# Altium PCB Power_Embedded_Board.PcbDoc (part 2 of 2)
Units mil, origin at the board's own origin, x right, y up, seen from the top; angles counter-clockwise.
Board outline 7315 x 2525 mil, 4 copper layers (Top Layer, Ground, Battery Voltage, Bottom Layer), stack 62.2 mil thick; 158 components, 109 nets, 580 pads, 136 vias.
Unrouted connection lines stored in the file: 1.
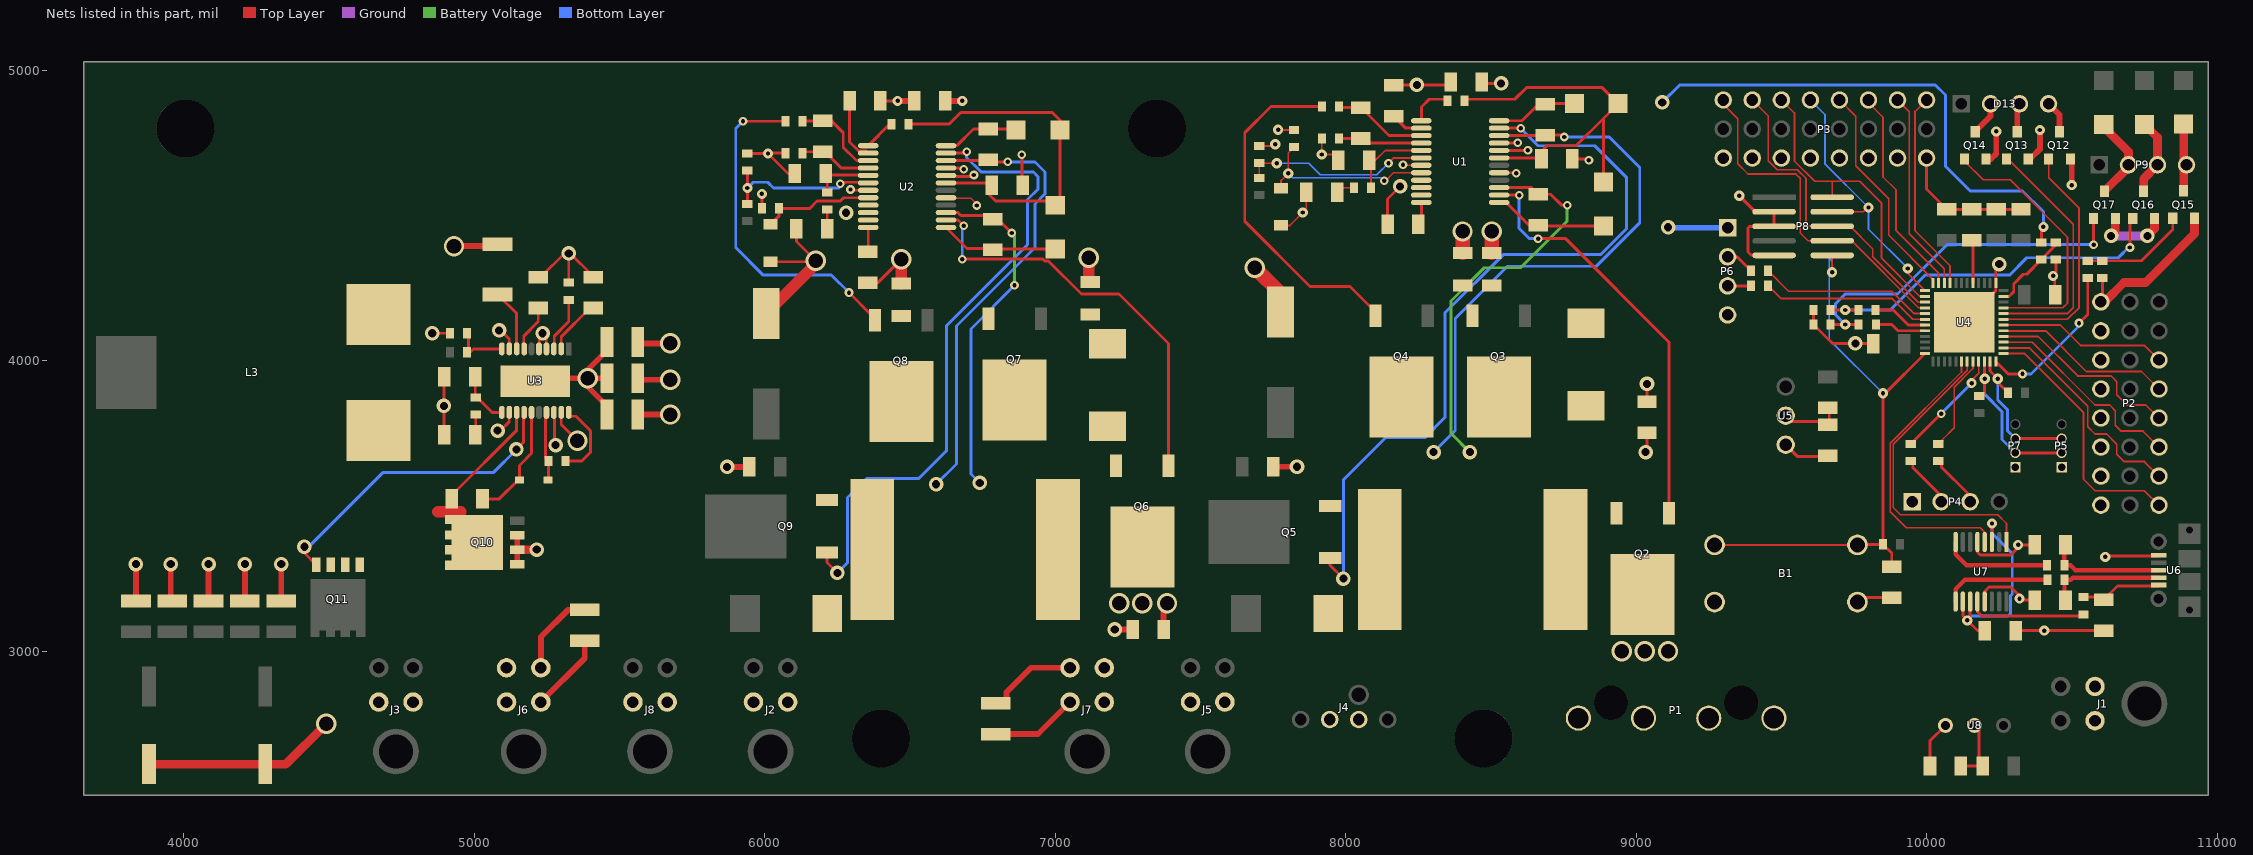
[diagram p4: the nets of this part, all layers, seen from the top]

## Via types
v1: diameter 50, hole 28, Top Layer to Bottom Layer, tented both sides, 45 vias
v2: diameter 35, hole 15, Top Layer to Bottom Layer, tented both sides, 37 vias
v3: diameter 30, hole 15, Top Layer to Bottom Layer, tented both sides, 35 vias
v4: diameter 70, hole 50, Top Layer to Bottom Layer, tented both sides, 19 vias

## Nets (pads, with @x,y where several pads share a name; then routed paths per layer and width w, separated by ;. In a path a pad name is that pad's centre, name@x,y a point inside that pad or via, vN(x,y) a via of type N, cw(c..) or ccw(c..) an arc to the next point about the centre after c; other vN are vias at no path point) (continued)
GND: B1.1 B1.2 C1.1 C2.1 C3.1 C4.1 C5.1 C6.1 C7.1 C8.1 C9.1 C13.1 C14.2 C15.1 C16.1 C17.1 C18.1 C19.1 C20.1 C21.1 C25.1 C26.2 C27.1 C28.1 C29.2 C30.1 C31.1 C32.1 C34.1 C35.1 C36.1 C37.2 C38.1 C39.2 C40.1 C41.1 C42.2 C43.1 C44.1 C45.1 C46.1 C47.1 C48.1 C49.1 C50.1 C51.1 C52.1 C53.1 C54.1 C55.2 C56.2 D4.2 D9.2 J1.1 J1.2 J2.1 J2.2 J3.1 J3.2 J4.2 J4.3 J5.1 J5.2 J6.3 J6.4 J7.3 J7.4 J8.1 J8.2 P1.1 P1.2 P2.3 P2.6 P2.9 P2.12 P2.15 P2.18 P2.21 P2.24 P3.3 P3.6 P3.9 P3.12 P3.15 P3.18 P3.21 P3.24 P4.1 P5.1 P6.4 P7.1 P8.3 P8.5 P8.9 Q10.1 Q10.2 Q10.3 Q12.S Q13.S Q14.S Q15.S Q16.S Q17.S R5.2 R6.1 R7.1 R10.1 R14.2 R15.1 R16.1 R20.1 R22.2 R24.1 R32.1 R39.1 R41.1 R43.1 U1.7 U1.9 U1.10 U1.11 U1.17 U1.20 U2.7 U2.9 U2.10 U2.11 U2.17 U2.20 U3.4 U3.5 U3.12 U3.18 U3.21 U4.0 U4.37 U5.2 U6.5 U7.5 U7.13 U8.2 | length 11075.9
  Top Layer w6: C36.1@3955,3178.15 C36.1@3960,3173.15 ; U2.17@6625.47,4560 6710,4560 6730,4540 v3(6730,4535) ; R10.1@7702.39,4739.59 7751.44,4739.59 v2(7757.39,4745.53) ; D4.2@7777.39,4466.16 7808.02,4466.16 v2(7852.39,4510.53) 7864.24,4522.39 C5.1@7864.24,4580.53 ; R5.2@7917.86,4765.53 7917.39,4765.06 v2(7917.39,4710.53) 7954.24,4710.53 C6.1@7974.24,4690.53 ; v3(8197.39,4675.53) 8199.75,4673.17 U1.7@8260.54,4673.17 ; v3@8585.34,4647.58 v3(8587.39,4645.53) ; v3@8626.21,4724.35 v3(8627.39,4725.53) ; v3@8832.39,4695.53 v3(8837.39,4690.53) ; U5.2@9515,3811.3 U5.2@9535,3791.3 ; B1.1@9762.13,3169.45 B1.1@9777.68,3185 ; v1@10238.27,4321.42 v1(10250,4333.15) ; v2@10315,3356.3 v2(10315,3366.3) ; v2@10320,3176.3 v2(10320,3181.3) ; v2@10441.3,4286.85 v2(10435.65,4292.5) v2@10445,4301.85
  Top Layer w10: v1(4855,4095) R24.1@4915.94,4095 ; C34.1@4896.85,3745 4895,3746.85 v1(4895,3845) 4895,3943.15 C32.1@4896.85,3945 ; v1(5080,3760) 5090,3760 5120.28,3790.28 U3.12@5120.28,3822.72 ; Q10.1@5147.8,3300.2 Q10.1@5147.99,3300 ; U3.21@5210,3930 U3.21@5220,3940 ; C29.2@5220,4293.15 5233.15,4293.15 5310,4370 v1(5325,4370) ; U3.5@5222.64,4041.22 5223.39,4041.97 5223.39,4072.56 5235,4084.18 v1(5235,4095) ; 5247.48,4071.7 5247.48,4041.97 U3.4@5248.23,4041.22 ; U3.18@5273.82,3822.72 5275.67,3820.86 5275.67,3714.33 v1(5280,3710) ; R22.2@5335,4265 5331.06,4265 5325,4271.06 v1(5325,4370) ; v4@5390,3911.38 v4(5390,3940) ; C31.1@5410,4288.15 5410,4290 5325,4375 v1(5325,4370) ; C30.1@5456.85,3815 C30.1@5456.85,3844.53 ; C27.1@5456.85,4035.47 C27.1@5456.85,4065 ; v1(5870,3635) v1@5885,3635 ; R20.1@5940,4714.06 v2(6010.94,4714.06) ; D9.2@6020,4341.26 6171.26,4341.26 v4(6175,4345) ; R14.2@6070.94,4715 6011.89,4715 v2(6010.94,4714.06) ; C18.1@6103.7,4645 6080,4645 v2(6010.94,4714.06) ; C17.1@6108.7,4455 6108.7,4411.3 v4(6175,4345) ; v4@6175,4333.23 v4(6175,4345) ; v3(6295,4590) 6297.8,4587.2 U2.7@6356.14,4587.2 ; C21.1@6355,4268.7 6388.7,4268.7 v4(6470,4350) ; C20.1@6398.15,4895 v2(6457.5,4895) ; C15.1@6505,4895 6510,4890 C15.1@6515,4895 ; U2.17@6623.86,4561.61 U2.17@6625.47,4560 ; U2.20@6623.86,4638.39 6627.24,4635 6715,4635 v3(6720,4640) ; C19.1@6878.15,4605 6885,4611.85 v3(6885,4710) ; C14.2@7775.54,4168.76 C14.2@7775.54,4232.39 ; C9.1@8144.24,4470.53 8144.24,4557.39 v1(8187.39,4600.53) ; C8.1@8165.54,4948.68 8176.85,4960 8186.85,4950 v1(8245,4950) 8351.85,4950 C4.1@8361.85,4960 ; U1.17@8528.25,4647.58 v3@8585.34,4647.58 ; U1.20@8528.25,4724.35 v3@8626.21,4724.35 ; C7.1@8780.54,4695.53 v3@8832.39,4695.53 ; C3.1@9037.39,3858.68 v1(9037.39,3920.53) ; v2(9355,4568.15) 9410,4513.15 P8.3@9475,4513.15 P8.5@9475,4463.15 9390.86,4463.15 9385,4457.29 9385,4375 9395.75,4364.25 9473.9,4364.25 P8.9@9475,4363.15 ; U5.2@9535,3791.3 9665,3791.3 9665,3821.3 C49.1@9680,3836.3 ; R41.1@9610.94,4175 R43.1@9610.94,4125 9675.94,4060 v1(9755,4060) 9815,4060 C47.1@9816.85,4058.15 ; B1.1@9777.68,3185 C54.1@9880,3185 ; P3.3@10000,4698.15 10000,4591.3 C46.1@10070,4521.3 C42.2@10155,4521.3 C45.1@10240,4521.3 C43.1@10325,4521.3 ; C1.1@10118.15,2605 C2.1@10193.7,2605 10180,2618.7 10180,2730 U8.2@10165,2745 ; U4.0@10130,4133.15 10238.27,4241.42 U4.37@10238.27,4268.39 v1@10238.27,4321.42 ; U7.5@10175,3376.3 10175,3341.3 10185,3331.3 10290,3331.3 v2@10315,3356.3 ; U7.13@10200,3171.3 10200,3206.3 10215,3221.3 10290,3221.3 10320,3191.3 v2(10320,3181.3) ; C53.1@10306.3,3071.3 v2(10405,3071.3) C50.1@10610,3071.3 ; v2(10315,3366.3) C51.1@10371.85,3366.3 ; v2@10320,3176.3 C52.1@10371.85,3176.3 ; C44.1@10441.3,4228.15 v2@10441.3,4286.85 ; v2@10445,4301.85 R32.1@10445,4348.62 ; P2.24@10600,4203.15 10605,4208.15 R39.1@10605,4285.47 ; v2(10615,3325) 10617.48,3327.48 U6.5@10798.7,3327.48
  Top Layer w20: C35.1@3835,3173.15 v1(3835,3300) ; C36.1@3955,3178.15 v1(3955,3300) ; C38.1@4085,3173.15 v1(4085,3300) ; C40.1@4210,3173.15 v1(4210,3300) ; C41.1@4335,3173.15 v1(4335,3300) ; Q10.1@5147.8,3300.2 Q10.2@5147.8,3350 Q10.3@5147.8,3400 ; U3.21@5220,3940 v4(5390,3940) ; J6.3@5229.06,2943.19 5229.06,3049.06 5323.15,3143.15 C55.2@5380,3143.15 ; v4@5390,3911.38 C30.1@5456.85,3844.53 ; C28.1@5456.85,3940 v4(5390,3940) ; C27.1@5456.85,4035.47 5390,3968.62 v4(5390,3940) ; v1@5885,3635 C25.1@5946.85,3635 ; v2(6457.5,4895) C15.1@6505,4895 ; C56.2@6795,2821.3 6820.98,2821.3 6832.63,2832.95 6832.63,2858.93 6916.89,2943.19 J7.4@7050.94,2943.19 ; v1(7205,3075) C16.1@7266.85,3075 ; C13.1@7750.54,3635.53 v1(7832.39,3635.53) ; Q14.S@10204.8,4695 10221.85,4695 10240,4713.15 v2(10240,4790) ; Q13.S@10359.8,4698.15 10390,4728.35 v2(10390,4795) ; Q12.S@10495,4698.15 Q12.S@10495,4695 10500,4690 v2(10500,4605)
  Top Layer w30: C37.2@3880,2611.14 C39.2@4280,2611.14 4351.14,2611.14 v4(4490,2750) ; Q10.2@5147.8,3350 v1(5215,3350) ; P2.24@10600,4203.15 10613.15,4203.15 10680,4270 10755,4270 10922.4,4437.4 Q15.S@10922.4,4490.51 ; v1(10635,4430) 10650,4445 Q17.S@10650,4490 ; v1(10760,4430) 10784.8,4454.8 Q16.S@10784.8,4490
  Top Layer w40: C26.2@6005,4163.23 v4@6175,4333.23 ; R15.1@6470,4266.1 v4(6470,4350) ; R16.1@7115,4271.1 v4(7115,4355)
  Top Layer w50: v4(7687.39,4320.53) C14.2@7775.54,4232.39 ; R6.1@8402.39,4371.64 v4(8402.39,4445.53) ; R7.1@8502.39,4371.64 v4(8502.39,4445.53)
  Ground w30: v1(10635,4430) v1(10760,4430)
  other v1: 6280,4510
NetC5_2: C5.2 R2.1 | length 63.5
  Top Layer w6: C5.2@7970.54,4580.53 7985.54,4595.53 R2.1@8027.86,4595.53
NetC6_2: C6.2 R2.2 U1.5 | length 291.7
  Top Layer w6: R2.2@8086.91,4595.53 8086.91,4684.16 C6.2@8080.54,4690.53 8102.39,4690.53 8136.21,4724.35 U1.5@8260.54,4724.35
NetC7_2: C7.2 D2.A D3.A R4.1 U1.19 | length 1291
  Top Layer w6: C7.2@8671.01,4698.76 C7.2@8674.24,4695.53 C7.2@8674.24,4722.39
  Top Layer w10: R4.1@8411.44,4900.53 8582.39,4900.53 8622.39,4940.53 8883.17,4940.53 D2.A@8938.17,4885.53 8887.39,4834.75 ; U1.19@8528.25,4698.76 C7.2@8671.01,4698.76 ; C7.2@8674.24,4722.39 8692.39,4740.53 8793.17,4740.53 8887.39,4834.75 ; D3.A@8887.39,4615.53 8887.39,4834.75
NetC8_2: C8.2 U1.2 | length 112.1
  Top Layer w10: C8.2@8165.54,4842.39 8206.8,4801.13 U1.2@8260.54,4801.13
NetC9_2: C9.2 U1.12 | length 96.4
  Top Layer w6: C9.2@8244.24,4455.53 C9.2@8260.54,4471.83
  Top Layer w10: C9.2@8260.54,4471.83 U1.12@8260.54,4545.22
NetC10_1: C10.1 D6.A L1.2 Q4.D Q5.S U1.22 | length 1983.2
  Top Layer w10: U1.22@8528.25,4775.53 C10.1@8687.39,4775.53 ; C10.1@8687.39,4777.39 8745.54,4777.39 v3(8752.39,4770.53)
  Bottom Layer w10: v1(8302.39,3685.53) 8377.39,3760.53 8377.39,4145.53 8557.39,4325.53 8862.39,4325.53 9012.39,4475.53 9012.39,4665.53 8907.39,4770.53 v3(8752.39,4770.53)
NetC10_2: C10.2 D2.K U1.24 | length 257.7
  Top Layer w6: C10.2@8687.39,4883.68 C10.2@8689.24,4885.53
  Top Layer w10: U1.24@8528.25,4826.72 8607.27,4826.72 C10.2@8662.39,4881.83 ; C10.2@8689.24,4885.53 D2.K@8787.39,4885.53
NetC11_1: C11.1 R5.1 U1.4 | length 290.1
  Top Layer w6: C11.1@8052.39,4765.53 C11.1@8067.98,4749.94
  Top Layer w10: R5.1@7976.91,4765.53 C11.1@8052.39,4765.53 ; C11.1@8067.98,4749.94 U1.4@8260.54,4749.94
NetC11_2: C11.2 R8.1 U1.3 | length 325
  Top Layer w6: R8.1@7976.91,4875.53 R8.1@7980.61,4871.83
  Top Layer w10: R8.1@7980.61,4871.83 C11.2@8052.39,4871.83 8148.69,4775.53 U1.3@8260.54,4775.53
NetC12_1: C12.1 D5.K L1.1 Q2.S Q3.D U1.15 | length 1375.2
  Top Layer w10: U1.15@8528.25,4596.4 8639.67,4596.4 C12.1@8662.39,4573.68 8705.54,4573.68 8743.69,4535.53 v3(8762.39,4535.53)
  Battery Voltage w10: v1(8427.39,3685.53) 8362.39,3750.53 8362.39,4205.53 8477.39,4320.53 8602.39,4320.53 8762.39,4480.53 v3(8762.39,4535.53)
NetC12_2: C12.2 D3.K U1.13 | length 392.5
  Top Layer w6: U1.13@8528.25,4545.22 U1.13@8552.7,4545.22 ; C12.2@8630.54,4467.39 C12.2@8662.39,4467.39 C12.2@8665.02,4464.75
  Top Layer w10: U1.13@8552.7,4545.22 C12.2@8630.54,4467.39 ; C12.2@8665.02,4464.75 D3.K@8887.39,4464.75
NetC17_2: C17.2 R11.1 | length 65.5
  Top Layer w10: C17.2@6215,4455 R11.1@6215,4520.47
NetC18_2: C18.2 R11.2 U2.5 | length 209.4
  Top Layer w10: C18.2@6210,4645 C18.2@6215,4640 ; R11.2@6215,4579.53 C18.2@6215,4640 ; U2.5@6356.14,4638.39 6354.53,4640 C18.2@6215,4640
NetC19_2: C19.2 D7.A D8.A R13.1 U2.19 | length 1272.9
  Top Layer w10: R13.1@6494.53,4815 6635,4815 6675,4855 6990,4855 7015.79,4829.21 D7.A@7015.79,4795 7015.79,4551.57 D8.A@7000,4535.79 6985.79,4550 6795,4550 6771.85,4573.15 C19.2@6771.85,4605 ; U2.19@6623.86,4612.8 6769.65,4612.8 C19.2@6771.85,4615
NetC20_2: C20.2 U2.2 | length 221.4
  Top Layer w10: C20.2@6291.85,4895 6291.85,4753.92 6322.38,4723.39 6347.91,4723.39 U2.2@6356.14,4715.16
NetC21_2: C21.2 U2.12 | length 84.7
  Top Layer w10: C21.2@6355,4375 6356.14,4376.14 U2.12@6356.14,4459.25
NetC22_1: C22.1 D11.A L2.2 Q8.D Q9.S U2.22 | length 1589.8
  Top Layer w10: U2.22@6623.86,4689.57 6767.72,4689.57 C22.1@6770,4691.85 6776.85,4685 v3(6836.85,4685)
  Bottom Layer w10: v1(6590,3575) 6660,3645 6660,4120 6930,4390 6930,4540 6965,4575 6965,4650 6930,4685 v3(6836.85,4685)
NetC22_2: C22.2 D7.K U2.24 | length 266.2
  Top Layer w10: U2.24@6623.86,4740.75 6660.75,4740.75 6718.15,4798.15 C22.2@6770,4798.15 6861.85,4798.15 D7.K@6865,4795
NetC23_1: C23.1 R14.1 U2.4 | length 251.4
  Top Layer w10: R14.1@6130,4715 6135,4720 C23.1@6200,4720 6207.12,4720 6263.14,4663.98 U2.4@6356.14,4663.98
NetC23_2: C23.2 R17.1 U2.3 | length 312.6
  Top Layer w10: R17.1@6130,4825 6131.3,4826.3 C23.2@6200,4826.3 6228.7,4826.3 6270,4785 6270,4735 6315.43,4689.57 U2.3@6356.14,4689.57
NetC24_1: C24.1 D10.K L2.1 Q6.S Q7.D U2.15 | length 1191.9
  Top Layer w10: U2.15@6623.86,4510.43 6664.57,4510.43 6675,4500 6778.15,4500 C24.1@6785,4493.15 ; C24.1@6785,4488.15 6801.85,4488.15 v3(6850,4440)
  Battery Voltage w10: v3(6850,4440) 6860,4430 v3(6860,4260)
  Bottom Layer w10: v1(6740,3580) 6710,3610 6710,4110 v3(6860,4260)
NetC24_2: C24.2 D8.K U2.13 | length 406.9
  Top Layer w10: U2.13@6623.86,4459.25 6696.26,4386.85 6785,4386.85 6786.85,4385 D8.K@7000,4385
NetC29_1: C29.1 U3.7 | length 166.9
  Top Layer w10: U3.7@5171.46,4041.22 5170,4042.68 5170,4085 5220,4135 C29.1@5220,4181.85 C29.1@5220,4186.85
NetC31_2: C31.2 U3.2 | length 193.4
  Top Layer w10: U3.2@5299.41,4041.22 5299.41,4083.07 5398.19,4181.85 C31.2@5410,4181.85
NetC32_2: C32.2 R26.2 U3.11 | length 182.4
  Top Layer w10: C32.2@5003.15,3945 5003.15,3876.38 R26.2@5005,3874.53 5008.94,3874.53 5060.75,3822.72 U3.11@5094.68,3822.72
NetC33_1: C33.1 L3.1 Q10.5 Q10.6 Q10.7 Q10.8 Q10.9 Q11.1 Q11.2 Q11.3 U3.13 | length 469
  Top Layer w10: C33.1@4921.85,3525 4921.85,3536.81 5145.87,3760.83 U3.13@5145.87,3822.72
  Top Layer w40: 4875,3480 4921.85,3480 4953.5,3480
NetC33_2: C33.2 D12.K U3.15 | length 403.9
  Top Layer w10: C33.2@5028.15,3525 5086.06,3525 5151.06,3590 D12.K@5155,3590 5155,3640 5197.05,3682.05 U3.15@5197.05,3822.72
NetC34_2: C34.2 R26.1 | length 71.2
  Top Layer w10: C34.2@5003.15,3745 5005,3746.85 R26.1@5005,3815.47
NetC42_1: C42.1 U4.41 | length 148.5
  Top Layer w6: C42.1@10155,4415 C42.1@10159.53,4410.47
  Top Layer w10: U4.41@10159.53,4268.39 C42.1@10159.53,4410.47
NetC50_2: C50.2 R37.1 U6.1 | length 282
  Top Layer w6: C50.2@10601.3,3186.3 C50.2@10610,3177.6
  Top Layer w10: R37.1@10540,3186.3 C50.2@10601.3,3186.3 ; C50.2@10610,3177.6 10657.52,3225.12 U6.1@10798.7,3225.12
NetC53_2: C53.2 U7.3 U7.10 U7.11 | length 778.7
  Top Layer w10: U7.10@10125,3171.3 10125,3121.3 v2(10140,3106.3) ; U7.11@10150,3171.3 10150,3116.3 v2(10140,3106.3) ; C53.2@10200,3071.3 10175,3071.3 v2(10140,3106.3) ; U7.3@10225,3376.3 v2(10225,3440)
  Bottom Layer w10: v2(10140,3106.3) 10155,3121.3 10280,3121.3 10289.5,3130.8 10289.5,3191.86 10295,3197.36 10295,3336.3 10225,3406.3 v2(10225,3440)
NetD4_1: D4.1 R3.1 U1.8 | length 639
  Top Layer w6: D4.1@7777.39,4594.9 7777.39,4620.53 v2(7802.39,4645.53) 7802.39,4715.53 R3.1@7822.39,4735.53 ; v3(8132.39,4620.53) 8137.39,4620.53 8164.43,4647.58 U1.8@8260.54,4647.58
  Bottom Layer w6: v2(7802.39,4645.53) 7817.39,4630.53 8122.39,4630.53 v3(8132.39,4620.53)
NetD5_A: D5.A Q3.S Q4.S R6.2 R7.2 R8.2 | length 1199.9
  Top Layer w10: R8.2@7917.86,4875.53 7742.39,4875.53 7652.39,4785.53 7652.39,4480.53 7877.39,4255.53 8014.47,4255.53 8102.23,4167.77 Q4.S@8102.23,4155.06
NetD9_1: D9.1 R12.1 U2.8 | length 389
  Top Layer w10: D9.1@6020,4470 6049.53,4499.53 R12.1@6049.53,4525 6155,4525 6180,4550 6260,4550 6271.61,4561.61 U2.8@6356.14,4561.61
NetD10_A: D10.A Q7.S Q8.S R15.2 R16.2 R17.2 | length 1151.6
  Top Layer w10: v3(5925,4825) R17.2@6070.94,4825 ; v3(6290,4235) Q8.S@6365,4160
  Bottom Layer w10: v3(5925,4825) 5900,4800 5900,4390 5995,4295 6230,4295 v3(6290,4235)
NetD12_A: D12.A R25.2 U3.17 | length 234.2
  Top Layer w10: U3.17@5248.23,3822.72 5245,3819.49 5245,3665.47 R25.2@5255.47,3655 5255.47,3597.05 D12.A@5253.43,3595
NetD13_2: D13.2 Q14.D | length 117.3
  Top Layer w20: Q14.D@10167.4,4789.49 10220,4842.09 D13.2@10220,4885
NetD13_3: D13.3 Q13.D | length 90.5
  Top Layer w20: Q13.D@10312.4,4792.64 D13.3@10312.4,4883.15
NetD13_4: D13.4 Q12.D | length 111.5
  Top Layer w20: D13.4@10420,4885 10457.6,4847.4 Q12.D@10457.6,4789.49 ; Q12.D@10459.83,4790.41 Q12.D@10460,4790
NetP4_2: P4.2 R28.2 | length 184
  Top Layer w10: R28.2@9945,3655.47 9952.45,3648.02 9952.45,3632.55 10040.43,3544.57 10040.43,3524.57 P4.2@10050,3515
NetP4_3: P4.3 R27.2 | length 187.4
  Top Layer w10: R27.2@10040,3655.47 10042.34,3655.47 10051.12,3646.69 10051.12,3633.88 10140.43,3544.57 10140.43,3524.57 P4.3@10150,3515
NetP6_2: P6.2 R29.1 | length 100.4
  Top Layer w10: P6.2@9315,4358.15 9347.32,4358.15 R29.1@9395.47,4310
NetP6_3: P6.3 R30.1 | length 80.5
  Top Layer w10: P6.3@9315,4258.15 R30.1@9395.47,4258.15
NetQ15_G: Q15.G R38.2 R39.2 | length 375.3
  Top Layer w10: R38.2@10555,4344.53 R39.2@10605,4344.53 10739.53,4344.53 10847.6,4452.6 Q15.G@10847.6,4490.51
NetQ16_G: Q16.G R40.2 R41.2 | length 1275.7
  Top Layer w10: R41.2@9670,4175 v2(9720,4175) R40.2@9765.47,4175 ; v3(10700,4390) 10700,4480 Q16.G@10710,4490
  Bottom Layer w10: v2(9720,4175) 9875,4175 9995,4295 10285,4295 10345,4355 10660,4355 10700,4395 v3(10700,4390)
NetQ17_G: Q17.G R42.2 R43.2 | length 1244.2
  Top Layer w10: R43.2@9670,4125 v2(9720,4125) R42.2@9765.94,4125 ; v3(10575,4400) 10575,4489.8 Q17.G@10575.2,4490
  Bottom Layer w10: v2(9720,4125) 9686.5,4158.5 9686.5,4196.5 9720,4230 9900,4230 10070,4400 v3(10575,4400)
NetR4_2: R4.2 U1.1 | length 149.9
  Top Layer w10: U1.1@8260.54,4826.72 8260.54,4873.68 8287.39,4900.53 R4.2@8352.39,4900.53
NetR9_1: R9.1 R10.2 U1.6 | length 649.3
  Top Layer w6: R9.1@7702.39,4630.06 R10.2@7702.39,4680.53 v2(7762.39,4680.53) ; v3(8147.39,4680.53) 8165.61,4698.76 U1.6@8260.54,4698.76
  Bottom Layer w6: v2(7762.39,4680.53) 7872.39,4680.53 7912.39,4640.53 8107.39,4640.53 v3(8147.39,4680.53)
NetR13_2: R13.2 U2.1 | length 110.1
  Top Layer w10: U2.1@6356.14,4740.75 6430.39,4815 R13.2@6435.47,4815
NetR19_1: R19.1 R20.2 U2.6 | length 562.8
  Top Layer w10: R19.1@5940,4540 v2(5940,4595) R20.2@5940,4655 ; v3(6260,4610) 6270,4610 6275,4615 6353.94,4615 U2.6@6356.14,4612.8
  Bottom Layer w10: v2(5940,4595) 5960,4615 6010,4615 6030,4595 6255,4595 6260,4600 v3(6260,4610)
NetR22_1: R22.1 U3.3 | length 195.4
  Top Layer w10: U3.3@5273.82,4041.22 5275,4042.4 5275,4085 5325,4135 5325,4205 5325.94,4205.94 R22.1@5335,4205.94
NetR23_2: R23.2 R24.2 U3.10 | length 190.2
  Top Layer w10: R23.2@4979.53,4030 R24.2@4979.53,4105 ; R23.2@4984.53,4028.94 4996.81,4041.22 U3.10@5094.68,4041.22
NetR25_1: R25.1 U3.20 | length 278.6
  Top Layer w10: R25.1@5314.53,3655 5370,3655 5400,3685 5400,3759.14 5349.84,3809.3 5329.47,3809.3 5325,3813.77 U3.20@5325,3822.72
NetR31_1: R31.1 R32.2 U4.35 | length 277.8
  Top Layer w6: R32.2@10445,4398.62 R32.2@10445,4407.68
  Top Layer w10: U4.35@10265.24,4221.73 10283.58,4221.73 10300,4238.15 10300,4265 10333.15,4298.15 10344.53,4298.15 R31.1@10395,4348.62 R32.2@10445,4398.62
NetR37_2: R37.2 U7.12 | length 408.7
  Top Layer w6: R37.2@10534.06,3121.3 R37.2@10540,3127.24
  Top Layer w10: U7.12@10175,3171.3 10175,3136.3 10190,3121.3 R37.2@10534.06,3121.3
NetR38_1: R38.1 U4.24 | length 550.8
  Top Layer w10: U4.24@10238.27,3997.91 10281.18,3955 v3(10330,3955) ; v3(10525,4130) 10555,4160 R38.1@10555,4285.47
  Bottom Layer w10: v3(10330,3955) 10360,3955 10525,4120 v3(10525,4130)
NetR40_1: R40.1 U4.7 | length 191.6
  Top Layer w10: R40.1@9824.53,4175 9885,4175 9936.69,4123.31 U4.7@9994.76,4123.31
NetR42_1: R42.1 U4.8 | length 178.6
  Top Layer w10: R42.1@9825,4125 9880,4125 9901.38,4103.62 U4.8@9994.76,4103.62
NetU4_18: U4.18 U7.4 | length 973.5
  Top Layer w6: U4.18@10120.16,3997.91 10120.16,3961.74 9875,3716.58 9875,3480 9930,3425 10185,3425 U7.4@10200,3410
NetU4_19: U4.19 U7.1 | length 1085
  Top Layer w6: U4.19@10139.84,3997.91 10139.84,3967.99 9885,3713.15 9885,3495 9910,3470 10245,3470 10275,3440 U7.1@10275,3376.3
"PA0 ARM PWM 0": P2.1 U4.25 | length 885.6
  Top Layer w6: U4.25@10265.24,4024.88 10338.27,4024.88 10540,3823.15 10540,3593.15 10580,3553.15 10750,3553.15 P2.1@10800,3503.15
"PA1 ARM PWM 1": P2.4 U4.26 | length 779.1
  Top Layer w6: U4.26@10265.24,4044.57 10353.58,4044.57 10555,3843.15 10555,3773.15 10580,3748.15 10620,3748.15 10655,3713.15 10655,3678.15 10680,3653.15 10750,3653.15 P2.4@10800,3603.15
"PA2 ARM PWM 2": P2.7 U4.27 | length 713.6
  Top Layer w6: U4.27@10265.24,4064.25 10363.9,4064.25 10580,3848.15 10630,3848.15 10650,3828.15 10650,3778.15 10670,3758.15 10745,3758.15 P2.7@10800,3703.15
"PA3 ARM PWM 3": P2.10 U4.28 | length 677.4
  Top Layer w6: U4.28@10265.24,4083.94 10384.21,4083.94 10520,3948.15 10635,3948.15 10655,3928.15 10655,3883.15 10690,3848.15 10755,3848.15 P2.10@10800,3803.15
"PA4 ARM PWM 4": P2.13 U4.29 | length 617.8
  Top Layer w6: U4.29@10265.24,4103.62 10265.71,4103.15 10410,4103.15 10550,3963.15 10740,3963.15 P2.13@10800,3903.15
"PA5 ARM PWM 5": P2.16 U4.30 | length 584.5
  Top Layer w6: U4.30@10265.24,4123.31 10459.84,4123.31 10530,4053.15 10750,4053.15 P2.16@10800,4003.15
"PB11 LED R": Q12.G U4.31 | length 834.8
  Top Layer w6: U4.31@10265.24,4142.99 10484.84,4142.99 10525,4183.15 10525,4525 10420.2,4629.8 Q12.G@10420.2,4695 Q12.G@10420.2,4698.15
"PB12 LED G": Q13.G U4.32 | length 854.4
  Top Layer w6: U4.32@10265.24,4162.68 10484.53,4162.68 10505,4183.15 10505,4470 10285,4690 Q13.G@10285,4698.15
"PB13 LED B": Q14.G U4.33 | length 927.5
  Top Layer w6: Q14.G@10130,4698.15 Q14.G@10130,4695 10130,4688.15 10195,4623.15 10287.46,4623.15 10485,4425.61 10485,4198.15 10469.21,4182.36 U4.33@10265.24,4182.36
"PC8 MOTOR PWM 1": P3.1 U4.45 | length 696.4
  Top Layer w6: P3.1@10000,4898.15 9960,4858.15 9960,4448.15 10080.79,4327.36 U4.45@10080.79,4268.39
"PC9 MOTOR PWM 2": P3.4 U4.46 | length 696.5
  Top Layer w6: P3.4@9900,4898.15 9940,4858.15 9940,4438.15 10061.1,4317.05 U4.46@10061.1,4268.39
"PC10 MOTOR PWM 3": P3.7 U4.47 | length 729.8
  Top Layer w6: P3.7@9800,4898.15 9800,4888.15 9850,4838.15 9850,4633.15 9895,4588.15 9895,4448.15 10041.42,4301.73 U4.47@10041.42,4268.39
"PC11 MOTOR PWM 4": P3.10 U4.48 | length 763
  Top Layer w6: P3.10@9700,4898.15 9756.5,4841.65 9756.5,4671.65 9870,4558.15 9870,4433.15 10021.73,4281.42 U4.48@10021.73,4268.39
"PD11 PNEU UART TX": R27.1 U4.20 | length 335.9
  Top Layer w6: R27.1@10040,3714.53 10043.94,3714.53 10054.72,3725.31 10054.72,3729.24 10095,3769.53 10095,3909.21 10159.53,3973.74 U4.20@10159.53,3997.91
  Top Layer w10: R27.1@10039.53,3715 R27.1@10040,3714.53
"PD12 PNEU UART RX": R28.1 U4.21 | length 382.7
  Top Layer w6: v2(10155,3923.15) 10155,3933.15 10179.21,3957.36 U4.21@10179.21,3997.91
  Top Layer w10: R28.1@9945,3714.53 9948.94,3714.53 9957.72,3723.31 9957.72,3725.87 v3(10050,3818.15)
  Bottom Layer w10: v3(10050,3818.15) v2(10155,3923.15)
"PD13 I2C SDA": P5.2 P7.2 R33.2 U4.22 | length 594.7
  Top Layer w6: v2@10198.9,3939.25 v2(10200,3938.15)
  Top Layer w10: R33.2@10180,3870 10200,3890 v2(10200,3938.15) ; v2@10198.9,3939.25 U4.22@10198.9,3997.91 ; P7.2@10305.79,3683.15 P5.2@10464.98,3683.15
  Bottom Layer w10: v2(10200,3938.15) 10200,3885 10260,3825 10260,3728.94 P7.2@10305.79,3683.15
"PD14 I2C SCL": P5.3 P7.3 R34.2 U4.23 | length 530.6
  Top Layer w10: U4.23@10218.58,3997.91 10218.58,3964.57 v2(10245,3938.15) 10245,3925 R34.2@10285,3885 ; P7.3@10305.79,3732.36 P5.3@10464.98,3732.36
  Bottom Layer w10: v2(10245,3938.15) 10245,3865 10277.99,3832.01 10277.99,3760.16 P7.3@10305.79,3732.36
"PF0 MOTOR PWM 5/TCK": P3.13 P8.4 U4.1 | length 951.5
  Top Layer w6: P8.4@9675,4513.15 9782.49,4513.15 9797.49,4528.15 v2(9800,4528.15) ; v2(9935,4318.15) 9935,4301.18 U4.1@9994.76,4241.42
  Bottom Layer w6: P3.13@9600,4898.15 9650,4848.15 9650,4678.15 v2(9800,4528.15) 9800,4453.15 v2(9935,4318.15)
"PF1 MOTOR PWM 6/TMS": P3.16 P8.2 U4.2 | length 1037.9
  Top Layer w6: P3.16@9500,4898.15 9545,4853.15 9545,4688.15 9615,4618.15 9675,4618.15 ; P8.2@9675,4563.15 9675,4618.15 ; U4.2@9994.76,4221.73 9976.42,4221.73 9845,4353.15 9845,4543.15 9770,4618.15 9675,4618.15
"PF2 MOTOR PWM 7/TDO": P3.19 P8.6 U4.3 | length 1072.9
  Top Layer w6: P3.19@9400,4898.15 9455,4843.15 9455,4689.41 9486.26,4658.15 9555,4658.15 9585,4628.15 9585,4475 9595.99,4464.01 P8.6@9669.64,4464.01 ; P8.6@9675,4463.15 9736.85,4463.15 9815,4385 9815,4358.15 9971.1,4202.05 U4.3@9994.76,4202.05
"PF3 MOTOR PWM 8/TDI": P3.22 P8.8 U4.4 | length 1201.1
  Top Layer w6: P3.22@9300,4898.15 9300,4883.15 9350,4833.15 9350,4678.15 9385,4643.15 9550,4643.15 9565,4628.15 9565,4440 9591.85,4413.15 9741.85,4413.15 9972.35,4182.65 9994.48,4182.65 U4.4@9994.76,4182.36
"PF4 HYDRO UART TX": R29.2 U4.5 | length 601.3
  Top Layer w6: R29.2@9454.53,4310 9524.53,4240 9880,4240 9957.32,4162.68 U4.5@9994.76,4162.68
"PF5 HYDRO UART RX": R30.2 U4.6 | length 587.9
  Top Layer w6: R30.2@9454.53,4258.15 9497.68,4215 9880,4215 9952.01,4142.99 U4.6@9994.76,4142.99
RST: B1.3 B1.4 C54.2 P8.10 R18.1 U4.12 | length 2043.8
  Top Layer w6: B1.4@9270,3366.3 B1.3@9762.13,3366.3 B1.3@9763.98,3368.15 ; v2(9674.89,4304.84) 9674.89,4363.04 P8.10@9675,4363.15
  Top Layer w10: B1.3@9763.98,3368.15 R18.1@9850,3368.15 ; C54.2@9880,3291.3 9880,3338.15 R18.1@9850,3368.15 ; U4.12@9994.76,4024.88 9858.03,3888.15 v2(9850,3888.15) R18.1@9850,3368.15
  Bottom Layer w6: v2(9674.89,4304.84) 9674.89,4343.26 9665,4353.15 9665,4073.15 v2(9850,3888.15)
"Sense -": L3.2 R21.1 U3.8 | length 254.9
  Top Layer w10: L3.2@4670.16,4159.8 L3.2@4698.74,4188.39 ; R21.1@5080,4228.39 5145.87,4162.52 U3.8@5145.87,4041.22
"SOLEN6 DRAIN": D15.A P9.3 Q16.D | length 268.1
  Top Layer w30: Q16.D@10747.4,4584.49 10747.4,4627.4 P9.3@10795,4675 10795,4769.21 D15.A@10750,4814.21
"SOLEN7 DRAIN": D16.A P9.2 Q17.D | length 299.1
  Top Layer w10: D16.A@10610,4805 D16.A@10610,4814.21 ; P9.2@10695,4666.89 P9.2@10695,4675
  Top Layer w30: D16.A@10610,4805 10695,4720 P9.2@10695,4675 ; Q17.D@10612.6,4584.49 P9.2@10695,4666.89
"SOLEN15 DRAIN": D14.A P9.4 Q15.D | length 238.3
  Top Layer w10: P9.4@10885,4665 P9.4@10895,4675 P9.4@10885,4685
  Top Layer w30: Q15.D@10885,4585 P9.4@10885,4665 ; P9.4@10885,4685 D14.A@10885,4815
TG: Q11.4 U3.14 | length 1086.3
  Top Layer w10: v1(4415,3360) 4415,3337.99 Q11.4@4455.2,3297.8 ; v1(5145,3695) 5169.6,3719.6 5169.6,3820.86 U3.14@5171.46,3822.72
  Bottom Layer w10: v1(4415,3360) 4430,3360 4685,3615 5065,3615 v1(5145,3695)
TG1-12V: Q5.G U1.23 | length 2657.9
  Top Layer w6: v3@8601.8,4801.13 v3(8602.39,4800.53)
  Top Layer w10: Q5.G@7946.36,3320.38 7946.36,3296.56 v1(7992.39,3250.53) ; U1.23@8528.25,4801.13 v3@8601.8,4801.13
  Bottom Layer w10: v1(7992.39,3250.53) 7992.39,3590.53 8137.39,3735.53 8272.39,3735.53 8342.39,3805.53 8342.39,4165.53 8542.39,4365.53 8877.39,4365.53 8967.39,4455.53 8967.39,4630.53 8857.39,4740.53 8662.39,4740.53 v3(8602.39,4800.53)
TG1-19V: Q9.G U2.23 | length 2205.9
  Top Layer w10: Q9.G@6213.98,3339.84 6213.98,3306.02 v1(6250,3270) ; U2.23@6623.86,4715.16 6690.16,4715.16 v3(6695,4720)
  Bottom Layer w10: v1(6250,3270) 6285,3305 6285,3530 6350,3595 6530,3595 6625,3690 6625,4120 6905,4400 6905,4555 6940,4590 6940,4635 6925,4650 6745.36,4650 6695,4700.36 v3(6695,4720)
TG2-12V: Q2.G U1.14 | length 1451.3
  Top Layer w6: v3@8597.11,4570.81 v3(8597.39,4570.53)
  Top Layer w10: U1.14@8528.25,4570.81 v3@8597.11,4570.81 ; v3(8662.39,4420.53) 8757.39,4420.53 9112.54,4065.38 Q2.G@9112.54,3475.06
  Bottom Layer w10: v3(8597.39,4570.53) 8597.39,4455.53 8632.39,4420.53 v3(8662.39,4420.53)
TG2-19V: Q6.G U2.14 | length 1437.6
  Top Layer w10: U2.14@6623.86,4484.84 6665.16,4484.84 v3(6685,4465) ; v3(6680,4350) 6957.53,4350 6963.61,4343.92 6976.08,4343.92 7090,4230 7220,4230 7390.16,4059.84 Q6.G@7390.16,3638.98
  Bottom Layer w10: v3(6680,4350) 6680,4460 v3(6685,4465)
USBD_N: R35.1 U7.9 | length 371.9
  Top Layer w15: U7.9@10100,3171.3 10100,3213.8 10132.5,3246.3 R35.1@10415.94,3246.3
USBD_P: R36.2 U7.8 | length 373
  Top Layer w15: U7.8@10100,3376.3 10100,3333.8 10137.5,3296.3 R36.2@10415,3296.3
USBData_N: C52.2 R35.2 U6.2 | length 398.1
  Top Layer w15: C52.2@10478.15,3176.3 10475,3179.45 R35.2@10475,3246.3 10496.28,3246.3 10503.76,3253.78 U6.2@10798.7,3253.78
USBData_P: C51.2 R36.1 U6.3 | length 403.4
  Top Layer w15: C51.2@10478.15,3366.3 10474.06,3362.2 R36.1@10474.06,3296.3 10495.33,3296.3 10512.26,3279.37 U6.3@10798.7,3279.37
Vbat: C1.2 C3.2 C4.2 C15.2 C16.2 C27.2 C28.2 C30.2 C48.2 C55.1 C56.1 J6.1 J6.2 J7.1 J7.2 P1.3 P1.4 P6.1 Q2.D Q6.D R3.2 R12.2 R21.2 R31.2 U1.21 U2.21 U3.9 U3.19 U5.1 U8.1 | length 4316.4
  Top Layer w6: v2(7767.39,4795.53) 7767.86,4795.06 R3.2@7822.39,4795.06 ; v3@8591.8,4749.94 v3(8592.39,4750.53)
  Top Layer w10: R21.2@5073.39,4395 R21.2@5080,4401.61 ; v1(5085,4105) v1@5105,4105 ; v1@5090,4105 5120.28,4074.72 U3.9@5120.28,4041.22 ; U3.9@5118.42,4043.07 U3.9@5118.42,4058.49 ; U3.19@5299.92,3822.2 U3.19@5299.41,3822.72 5299.41,3780.59 v4(5355,3725) ; C30.2@5563.15,3815 C30.2@5568.15,3820 ; C28.2@5563.15,3940 C28.2@5568.15,3935 ; C27.2@5563.15,4065 C27.2@5568.15,4060 ; v2(5990,4575) 5990.47,4574.53 R12.2@5990.47,4525 ; U2.21@6623.86,4663.98 6681.02,4663.98 v3(6685,4660) ; v4@7373.15,3168.15 7381.3,3160 7385,3163.7 v4(7385,3165) ; C4.2@8480,4955 8517.08,4955 8535,4972.92 v1(8535,4955) ; U1.21@8528.25,4749.94 v3@8591.8,4749.94 ; Q2.D@8950,3123.15 Q2.D@9022.39,3195.53 Q2.D@9030,3187.92 ; v1(9032.39,3685.53) 9037.39,3690.53 C3.2@9037.39,3752.39 ; U5.1@9515,3711.3 9556.3,3670 C48.2@9680,3670 ; C1.2@10011.85,2605 10011.85,2691.85 U8.1@10065,2745 ; R31.2@10395,4407.68 10395,4454.09 v2(10402.03,4461.12) v2@10404.06,4459.09
  Top Layer w20: v4(4930,4395) R21.2@5073.39,4395 ; J6.1@5229.06,2825.08 5380,2976.02 C55.1@5380,3036.85 ; C30.2@5563.15,3815 v4(5675,3815) ; C28.2@5568.15,3935 v4(5675,3935) ; C27.2@5568.15,4060 v4(5675,4060) ; C15.2@6621.3,4895 v2(6680,4895) ; C56.1@6795,2715 6940.87,2715 J7.2@7050.94,2825.08 ; C16.2@7373.15,3075 v4@7373.15,3168.15
  Battery Voltage w6: v2(10402.03,4461.12) v2@10412.97,4461.12
  Battery Voltage w10: P6.1@9308.15,4465 P6.1@9315,4458.15
  Bottom Layer w10: v1(9090,4890) 9150,4950 10030,4950 10065,4915 10065,4670 10150,4585 10330,4585 10402.03,4512.97 v2(10402.03,4461.12) ; v1(9110,4460) v1@9111.85,4458.15
  Bottom Layer w20: v1@9111.85,4458.15 P6.1@9315,4458.15
  other v4: 8950,3000 9030,3000 9110,3000 7220,3165 7300,3165
pads on no net: J1. J2. J3. J4.0 J4.1 J5. J6. J7. J8. L3.NC P1. P2.19 P2.22 P8.7 U3.1 U3.6 U4.10 U4.11 U4.13 U4.14 U4.15 U4.16 U4.17 U4.36 U4.38 U4.43 U4.44 U6.0 U6.4 U7.2 U7.6 U7.7 U7.14 U7.15 U7.16

## Polygon pours and split planes (outlines as drawn)
GND on Ground "GND" (solid, pour order 54): 3770,5010 10660,5010 10660,2690 3770,2690
no net on Ground "Ground-No Net 1" (solid, pour order 18): 4990,3275
no net on Ground "Ground-No Net 2" (solid, pour order 20): 4990,3275
NetD10_A on Top Layer "NetD10_A" (solid, pour order 108): 6388.21,4205.2 6328.21,4145.2 6328.21,4007.96 6352.9,3980.81 7256.13,3980.81 7270,4003 7270,4110 7174.8,4205.2
NetC22_1 on Top Layer "NetC22_1" (solid, pour order 110): 6130,3045 6624.14,3045 6642.62,3060 6642.62,3920.53 6587.62,3950.53 6347.62,3950.53 6130,3732.91
NetC10_1 on Top Layer "NetC10_1" (solid, pour order 62): 7867.39,3040.53 7907.92,3000 8162.6,3000 8347.39,3150 8347.39,4010.53 8292.39,4040.53 8052.39,4040.53 7867.39,3855.53
NetD5_A on Top Layer "NetD5_A" (solid, pour order 58): 8122.39,4305.53 8062.39,4245.53 8062.39,4097.03 8100.11,4055.53 8901.76,4055.53 8927.39,4096.53 8927.39,4205.53 8827.39,4305.53
GND on Top Layer "GND_TOP_19V" (solid, pour order 104): 6392.5,4545 6392.5,4475 6280,4475 6262.5,4492.5 6262.5,4530 6282.5,4545
Vbat on Top Layer "Vbat_TOP_12V" (solid, pour order 70): 8915,3095 9130,3095 9130,2990 9120,2980 8930,2980 8915,2995
GND on Top Layer "GND_TOP_12V" (solid, pour order 68): 8297.39,4630 8297.39,4565 8187.92,4565 8167.39,4585.53 8167.39,4615.53 8186.67,4630
no net on Top Layer "Top Layer-No Net" (solid, pour order 98): 5130,4285
Vbat on Top Layer "Vbat_TOP_19V" (solid, pour order 114): 7190,3260 7405,3260 7405,3155 7395,3145 7205,3145 7190,3160
48V on Top Layer "Top Layer-48V" (solid, pour order 48): 4945,2885 4945,3130 3790,3130 3745,3085 3745,2840 3815,2770 4280,2770 4355,2810 4355,2885
NetC12_1 on Top Layer "NetC12_1" (solid, pour order 60): 8372.39,4010.53 8414.05,4040.53 8917.39,4040.53 8977.39,3980.53 8977.39,3410.53 8947.39,3380.53 8892.39,3380.53 8862.39,3355.53 8862.39,3020.53 8812.39,2970.53 8507.39,2970.53 8372.39,3150
12V on Top Layer "12V" (solid, pour order 66): 7502.39,3885.53 7567.39,3945.53 7815.72,3945.53 7852.39,3920.15 7852.39,2935.86 7814.17,2890 7603.53,2890 7502.39,3004.63
"Sense -" on Top Layer "Top Layer-Sense-" (solid, pour order 102): 4530,4035 4545,4020 4790,4020 4805,4035 4805,4170 5150,4170 5160,4180 5160,4285 5135,4310 4565,4310 4530,4275
19V on Top Layer "19V" (solid, pour order 106): 6107.39,2996.79 6145,2954.36 6145,2906.17 6118.82,2885 5505,2885 5475,2915 5475,2965 5535,3025 5677.88,3025 5757.39,3100.5 5757.39,3910.53 5822.39,3970.53 6070.72,3970.53 6107.39,3945.15
NetC24_1 on Top Layer "NetC24_1" (solid, pour order 112): 6697.39,3925.53 6739.05,3955.53 7242.39,3955.53 7302.39,3895.53 7302.39,3557.39 7275,3530 7183,3530 7150,3502.5 7150,3065 6697.39,3065
NetC33_1 on Top Layer "Netc33_1" (solid, pour order 116): 4495.2,3853.41 4565,3915 4766.15,3915 4820,3868.33 4820,3661.15 4972.5,3563.65 4972.5,3270 4494.81,3270
3V3 on Battery Voltage "3V3" (solid, pour order 52): 9945.96,3300 9235,4153.15 9235,4853.15 10060,4853.15 10760,4253.15 10760,3300
Vbat on Battery Voltage "Vbat_Vbat" (solid, pour order 72): 4875,5010 9030,5010 9180,4860 9180,4155 10125,3035 10125,2690 4875,2690
no net on Battery Voltage "Battery Voltage-No Net" (solid, pour order 92): 4720,3980

## Keep-outs
Keep-Out Layer:
  the board outline again, w10

## Silkscreen, mask and mechanical layers (free items; w line width, h text height)
Top Overlay:
  circle w10: c4005,4800 r135.83
  circle w10: c7350,4800 r135.83
  circle w10: c8475,2700 r135.83
  circle w10: c6400,2700 r135.83
  lines w10: 4950,2885 4950,2990 ; 5390,2885 5390,2990 ; 6240,2885 6240,2985
  text "Motors" at 9415,4950 h32
  text "CU Boulder RoboSub / Power/Embedded System Board / Rev 4" at 4160,4615 h60
  text "Hydrophones" at 9235,4130 h32 r90
  text "Servos" at 10525,4070 h32 r90
  text "SCL" at 10110,3725 h32
  text "SDA" at 10110,3680 h32
  text "Rx" at 10025,3605 h32
  text "Tx" at 10120,3600 h32
  text "I2C_Bus" at 10310,3530 h32
  text "Pnuematics" at 9905,3415 h32
  text "19V" at 5655,3080 h60
  text "48V" at 4715,3075 h60
  text "Vbat" at 5080,3075 h60
  text "Vbat" at 6675,2560 h60
  text "12V" at 7805,2545 h60
  text "9V" at 10455,2545 h60

## Dimensions
3655,2505 to 3655,5030 on Mechanical 13
3655,2505 to 10970,2505 on Mechanical 13

## Text inside footprints (layer, text, board x,y; h text height)
D2: Top Overlay "A" at 8896.84,4898.33 h31.5 r180; Top Overlay "K" at 8849.59,4898.33 h31.5 r180
D3: Top Overlay "A" at 8874.59,4574.2 h31.5 r270; Top Overlay "K" at 8874.59,4526.95 h31.5 r270
D5: Top Overlay "A" at 8802.78,4062.07 h60 r270; Top Overlay "K" at 8802.78,3951.83 h60 r270
D6: Top Overlay "A" at 7873.07,3154.61 h60 r180; Top Overlay "K" at 7762.83,3154.61 h60 r180
D7: Top Overlay "A" at 6974.45,4807.8 h31.5 r180; Top Overlay "K" at 6927.2,4807.8 h31.5 r180
D8: Top Overlay "A" at 6987.2,4494.45 h31.5 r270; Top Overlay "K" at 6987.2,4447.2 h31.5 r270
D10: Top Overlay "A" at 7155.39,3991.54 h60 r270; Top Overlay "K" at 7155.39,3881.3 h60 r270
D11: Top Overlay "A" at 6148.07,3154.61 h60 r180; Top Overlay "K" at 6037.83,3154.61 h60 r180
D14: Top Overlay "A" at 10897.8,4856.34 h31.5 r90; Top Overlay "K" at 10897.8,4903.58 h31.5 r90
D15: Top Overlay "A" at 10762.8,4855.55 h31.5 r90; Top Overlay "K" at 10762.8,4902.8 h31.5 r90
D16: Top Overlay "A" at 10622.8,4855.55 h31.5 r90; Top Overlay "K" at 10622.8,4902.8 h31.5 r90
J1: Top Overlay "1" at 10619.29,2918.43 h19.68 r90; Top Overlay "2" at 10619.29,2800.32 h19.68 r90; Top Overlay "4" at 10501.18,2800.32 h19.68 r90; Top Overlay "3" at 10501.18,2918.43 h19.68 r90
J2: Top Overlay "1" at 6118.43,2785.71 h19.68; Top Overlay "2" at 6000.31,2785.71 h19.68; Top Overlay "4" at 6000.31,2903.82 h19.68; Top Overlay "3" at 6118.43,2903.82 h19.68
J3: Top Overlay "1" at 4828.43,2785.71 h19.68; Top Overlay "2" at 4710.31,2785.71 h19.68; Top Overlay "4" at 4710.31,2903.82 h19.68; Top Overlay "3" at 4828.43,2903.82 h19.68
J5: Top Overlay "1" at 7623.43,2785.71 h19.68; Top Overlay "2" at 7505.31,2785.71 h19.68; Top Overlay "4" at 7505.31,2903.82 h19.68; Top Overlay "3" at 7623.43,2903.82 h19.68
J6: Top Overlay "1" at 5268.43,2785.71 h19.68; Top Overlay "2" at 5150.31,2785.71 h19.68; Top Overlay "4" at 5150.31,2903.82 h19.68; Top Overlay "3" at 5268.43,2903.82 h19.68
J7: Top Overlay "1" at 7208.43,2785.71 h19.68; Top Overlay "2" at 7090.31,2785.71 h19.68; Top Overlay "4" at 7090.31,2903.82 h19.68; Top Overlay "3" at 7208.43,2903.82 h19.68
J8: Top Overlay "1" at 5703.43,2785.71 h19.68; Top Overlay "2" at 5585.31,2785.71 h19.68; Top Overlay "4" at 5585.31,2903.82 h19.68; Top Overlay "3" at 5703.43,2903.82 h19.68